# Altium PCB METR4810_PCBLayout.PcbDoc
Units mil, origin at the board's own origin, x right, y up, seen from the top; angles counter-clockwise.
Board outline 2500.12 x 1950.12 mil, 2 copper layers (Top Layer, Bottom Layer); 44 components, 43 nets, 178 pads, 18 vias.
Unrouted connection lines stored in the file: 2.
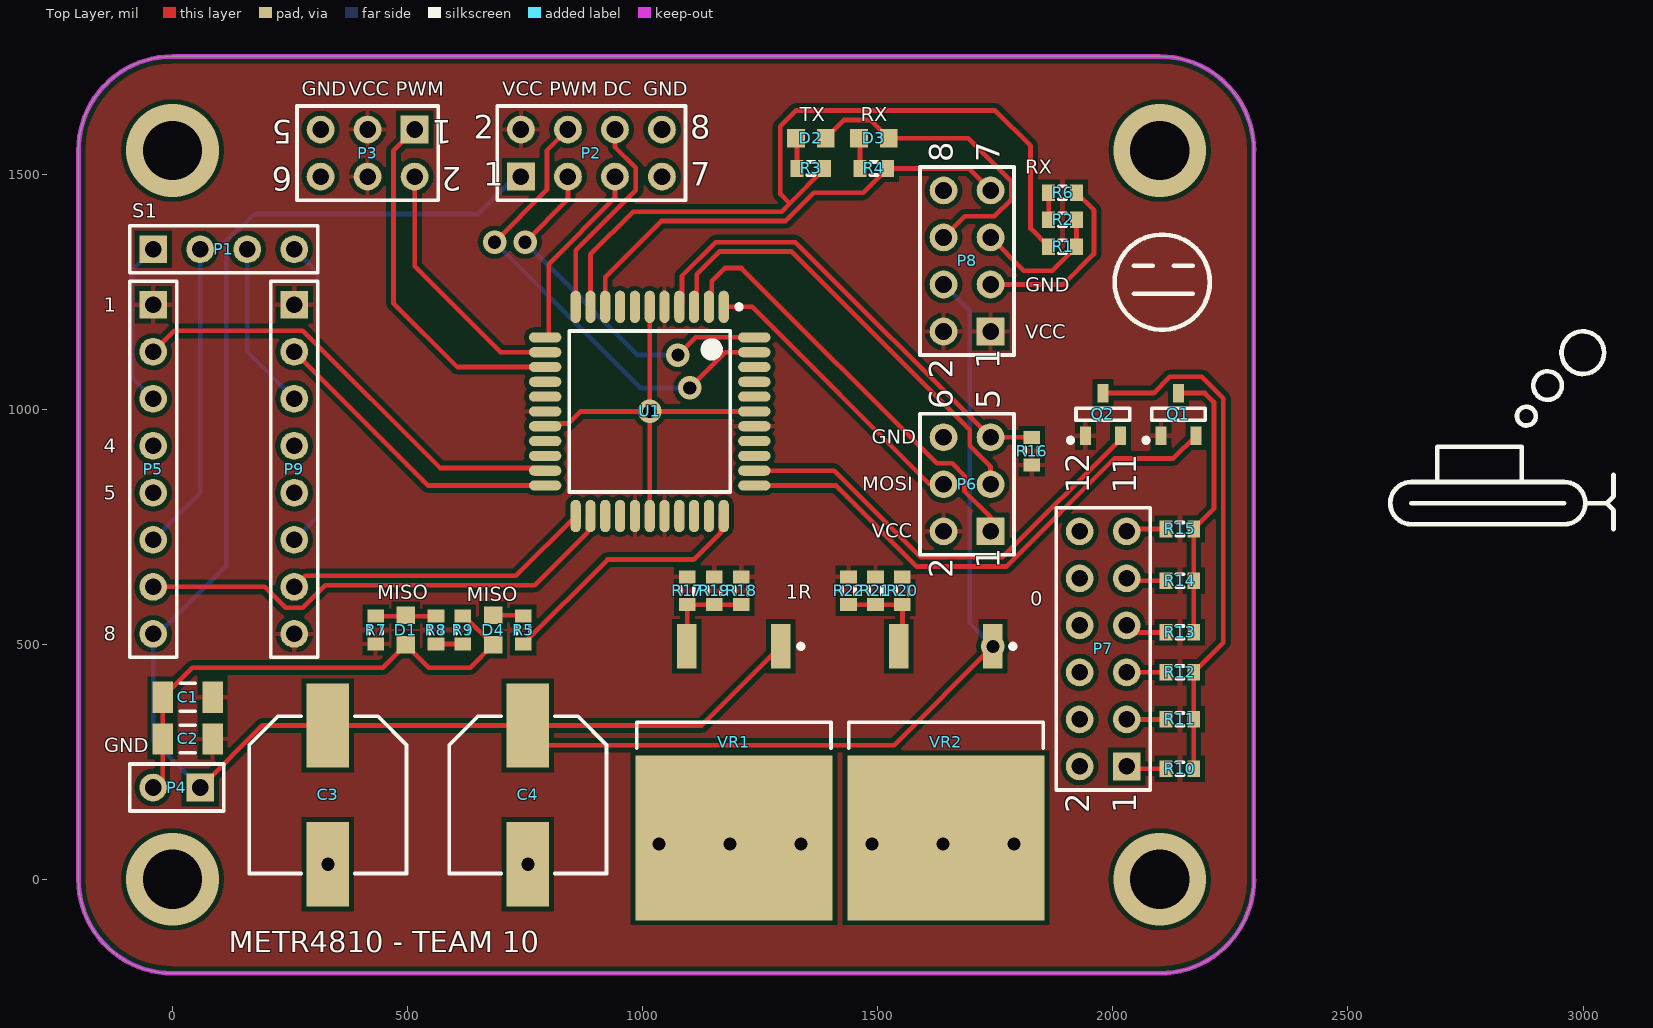
[diagram p0: Top Layer view]
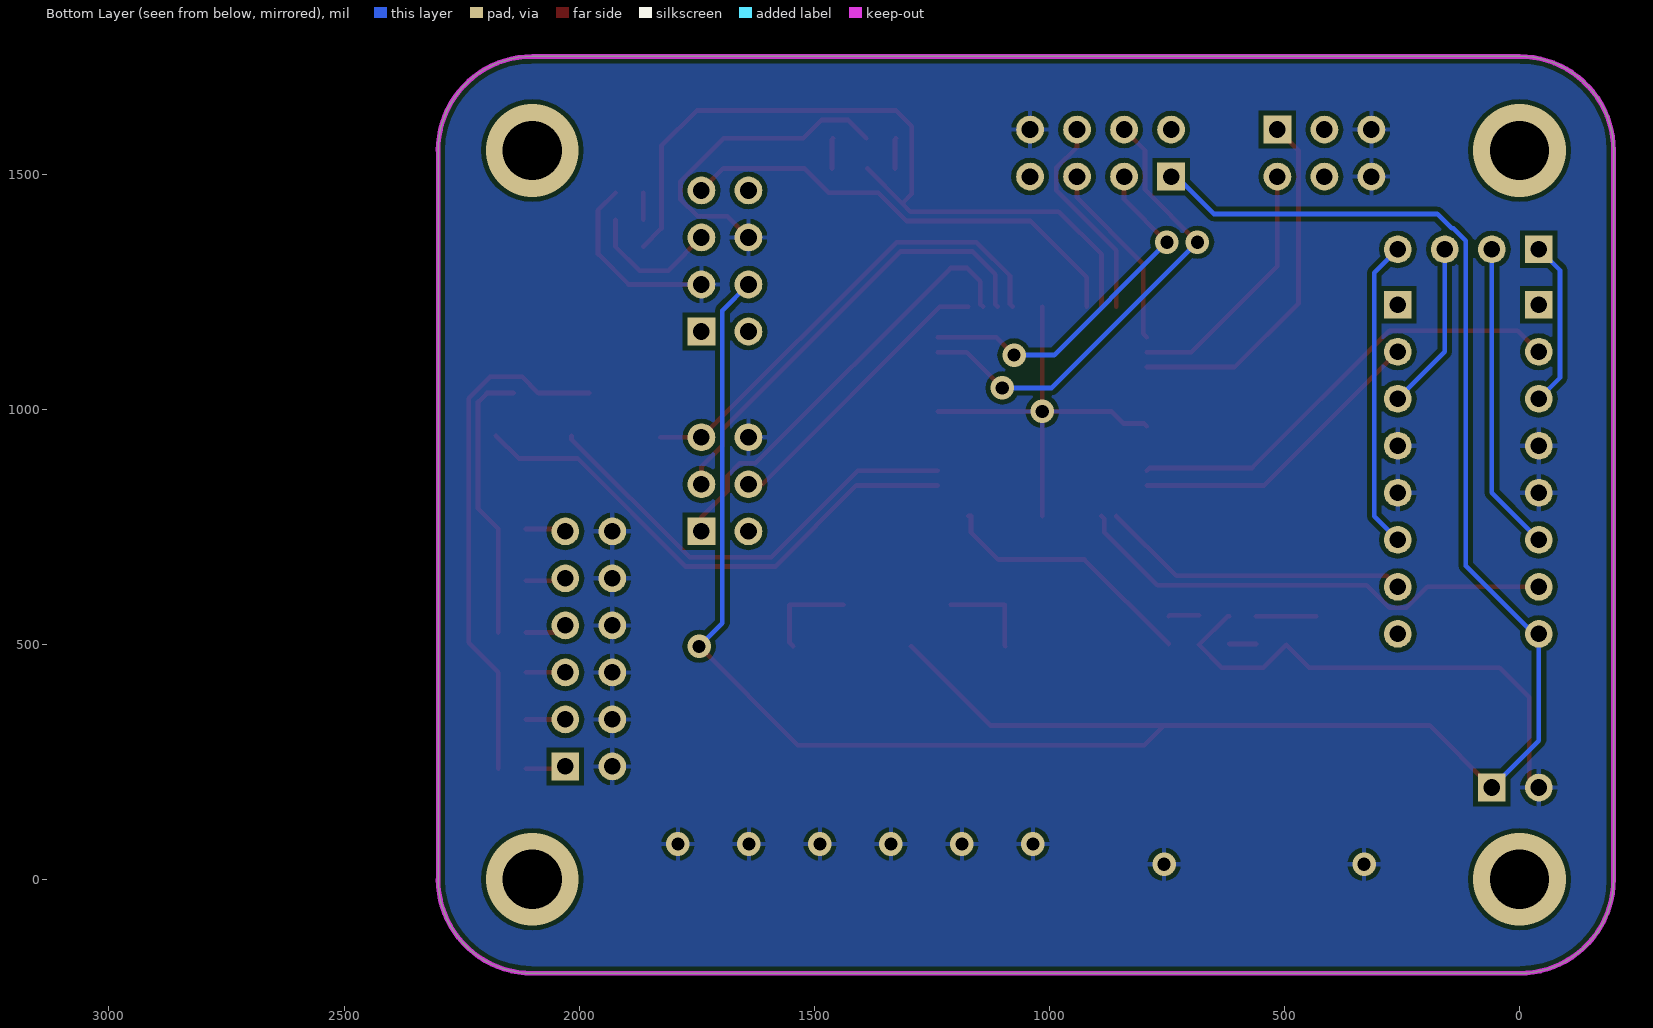
[diagram p1: Bottom Layer view, seen from below]

## Layer stack, top to bottom
Top Solder: solder mask 0.4, Solder Resist, Dk 3.5
Top Layer: signal copper 1.4
Dielectric 1: dielectric 12.6, FR-4, Dk 4.8
Bottom Layer: signal copper 1.4
Bottom Solder: solder mask 0.4, Solder Resist, Dk 3.5

## Board outline
-200,0 -200,1550 -200.06,1550 cw(c0,1550) 0,1750.06 0,1750 2100,1750 2100,1750.06 cw(c2100,1550) 2300.06,1550 2300,1550 2300,0 2300.06,0 cw(c2100,0) 2100,-200.06 2100,-200 0,-200 0,-200.06 cw(c0,0)

## Design rules (kind name [scope] priority, off if disabled: settings)
Clearance [All] p1: gap=10
PolygonConnect [All] p1: connectstyle=Relief reliefconductorwidth=10 reliefentries=4 polygonreliefangle="90 Angle" airgapwidth=10
RoomDefinition METR4810_Schematic [InComponentClass('METR4810_Schematic')] p1: confinementstyle=ConfineIn formatcopy=TRUE lockcomponents=FALSE outline -200,-200 2300,-200 2300,1750 -200,1750
RoutingVias [All] p1: holewidth=28 width=50 viastyle="Through Hole" minholewidth=28 minwidth=50 maxholewidth=28 maxwidth=50
SolderMaskExpansion [All] p1: expansion=4
Width [All] p1: maxlimit=10 minlimit=10 preferedwidth=10
30 further rules are at their usual default settings.

## Classes and differential pairs
component class METR4810_Schematic: C1 C2 C3 C4 D1 D2 D3 D4 P1 P2 P3 P4 P5 P6 P8 P9 R3 R4 R5 R7 R8 R9 R16 R17 R18 R19 R20 R21 R22 U1 VR1 VR2

## Components (designator, comment, footprint, x,y, rotation, side; value= is the part's Value field where it differs from the comment)
C1 "Cap Semi" C1206 32.13,387.07 r0 top
C2 "Cap Semi" C1206 32.13,298.32 r0 top
C3 "Cap Pol2" CAPAE9983X105M 330.52,179.46 r270 top
C4 "Cap Pol2" CAPAE9983X105M 755.89,179.46 r270 top
D1 "LED1" L0603 496.16,530.02 r270 top
D2 "LED1" L0603 1357.67,1575.91 r0 top
D3 "LED1" L0603 1491.7,1575.91 r0 top
D4 "LED1" L0603 681.7,530.02 r270 top
P1 "Header 4" HDR1X4 -41.1,1339.83 r0 top
P2 "Header 4X2" HDR2X4 741.01,1494.49 r0 top
P3 "Header 3X2" HDR2X3 515,1594.49 r180 top
P4 "Header 2" HDR1X2 58.9,195 r180 top
P5 "Header 8" HDR1X8 -41.1,1221.95 r270 top
P6 "Header 3X2" HDR2X3 1740,740 r90 top
P7 "Header 6X2" HDR2X6 2029.42,240 r90 top
P8 "Header 4X2" HDR2X4 1740,1165 r90 top
P9 "Header 8" HDR1X8 258.9,1221.95 r270 top
Q1 "MOSFET-P" SOT23-3 2139.54,988.77 r90 top
Q2 "MOSFET-P" SOT23-3 1978.94,988.77 r90 top
R1 "Res3" J1-0603 1893.16,1345.49 r0 top
R2 "Res3" J1-0603 1893.16,1402.75 r180 top
R3 "Res3" J1-0603 1357.67,1511.76 r0 top
R4 "Res3" J1-0603 1491.7,1511.76 r0 top
R5 "Res3" J1-0603 745.84,530.02 r270 top
R6 "Res3" J1-0603 1893.16,1460 r0 top
R7 "Res3" J1-0603 432.02,530.02 r90 top
R8 "Res3" J1-0603 560.3,530.02 r270 top
R9 "Res3" J1-0603 617.56,530.02 r90 top
R10 "Res3" J1-0603 2142.58,235 r0 top
R11 "Res3" J1-0603 2142.58,340 r0 top
R12 "Res3" J1-0603 2142.58,440 r0 top
R13 "Res3" J1-0603 2142.58,525 r0 top
R14 "Res3" J1-0603 2142.58,635 r0 top
R15 "Res3" J1-0603 2142.58,745 r0 top
R16 "Res3" J1-0603 1827.57,910.47 r270 top
R17 "Res3" J1-0603 1095,613.68 r90 top
R18 "Res3" J1-0603 1209.51,613.68 r90 top
R19 "Res3" J1-0603 1152.25,613.68 r90 top
R20 "Res3" J1-0603 1552.43,613.68 r90 top
R21 "Res3" J1-0603 1495.18,613.68 r90 top
R22 "Res3" J1-0603 1437.92,613.68 r90 top
U1 "ATmega324PA-AU" 44A_N 1015,995 r270 top
VR1 "Volt Reg" D2PAK_N 1194.05,227.69 r270 top
VR2 "Volt Reg" D2PAK_N 1645,227.69 r270 top

## Footprints (in the part's own frame and the unit in brackets; to place one, negate y for a bottom-side part, rotate by r counter-clockwise, add the part's x,y. Pads: shape width x height; smd on the part's side, far side on the other; paste and mask are expansions set on the pad)
44A_N [mm] "Thin QFP, 44-Leads, Body 10x10mm, Pitch 0.8mm, IPC Medium Density"
  oval 1.75x0.55 smd: 1(-5.65,4) 2(-5.65,3.2) 3(-5.65,2.4) 4(-5.65,1.6) 5(-5.65,0.8) 6(-5.65,0) 7(-5.65,-0.8) 8(-5.65,-1.6) 9(-5.65,-2.4) 10(-5.65,-3.2) 11(-5.65,-4) 23(5.65,-4) 24(5.65,-3.2) 25(5.65,-2.4) 26(5.65,-1.6) 27(5.65,-0.8) 28(5.65,0) 29(5.65,0.8) 30(5.65,1.6) 31(5.65,2.4) 32(5.65,3.2) 33(5.65,4)
  oval 0.55x1.75 smd: 12(-4,-5.65) 13(-3.2,-5.65) 14(-2.4,-5.65) 15(-1.6,-5.65) 16(-0.8,-5.65) 17(0,-5.65) 18(0.8,-5.65) 19(1.6,-5.65) 20(2.4,-5.65) 21(3.2,-5.65) 22(4,-5.65) 34(4,5.65) 35(3.2,5.65) 36(2.4,5.65) 37(1.6,5.65) 38(0.8,5.65) 39(0,5.65) 40(-0.8,5.65) 41(-1.6,5.65) 42(-2.4,5.65) 43(-3.2,5.65) 44(-4,5.65)
  silkscreen extent -5.77,-4.35 4.35,4.95, body extent -5,-5 5,5, height 1.2
C1206 [mm] "Chip Capacitor, Body 3.2x1.6mm, IPC High Density"
  rect 1.1x1.7 smd: 1(-1.35,0) 2(1.35,0)
  silkscreen extent -0.4,-0.75 0.4,0.75, body extent -1.7,-0.9 1.7,0.9, height 1.3
CAPAE9983X105M [mm] "Aluminum Electrolytic Capacitor, Body 8.30x8.30x10.50mm, IPC Low Density"
  rect 4.55x2.3 smd: 1(-3.75,0) 2(3.75,0)
  silkscreen extent -4.25,-4.25 4.25,4.25, body extent -4.25,-4.25 4.25,4.25, height 10.5
D2PAK_N [mm] "D2-PAK, 4-Leads, Body 8.8x10.4mm, Pitch 2.54mm, Lead Span 15.1mm, IPC Medium Density"
  rect 2.4x1.05 smd: 1(-6.8,2.54) 3(-6.8,-2.54)
  rect 8.9x10.65 smd: 2(3.55,0)
  silkscreen extent -6.92,-5.25 -1.3,5.25, body extent -2.7,-5.28 6.3,5.28, height 4.69
HDR1X2 [mm] "Connector; Header; 2 Position"
  rect 1.5x1.5 hole 0.9: 1(0,0)
  round 1.5 hole 0.9: 2(2.54,0)
  silkscreen extent -1.27,-1.27 3.81,1.27
HDR1X4 [mm] "Connector; Header; 4 Position"
  rect 1.5x1.5 hole 0.9: 1(0,0)
  round 1.5 hole 0.9: 2(2.54,0) 3(5.08,0) 4(7.62,0)
  silkscreen extent -1.27,-1.27 8.89,1.27
HDR1X8 [mm] "Connector; Header; 8 Position"
  rect 1.5x1.5 hole 0.9: 1(0,0)
  round 1.5 hole 0.9: 2(2.54,0) 3(5.08,0) 4(7.62,0) 5(10.16,0) 6(12.7,0) 7(15.24,0) 8(17.78,0)
  silkscreen extent -1.27,-1.27 19.05,1.27
HDR2X3 [mm] "Connector; Header; 3x2 Position"
  rect 1.5x1.5 hole 0.9: 1(0,0)
  round 1.5 hole 0.9: 2(0,2.54) 3(2.54,0) 4(2.54,2.54) 5(5.08,0) 6(5.08,2.54)
  silkscreen extent -1.27,-1.27 6.35,3.81
HDR2X4 [mm] "Connector; Header; 4x2 Position"
  rect 1.5x1.5 hole 0.9: 1(0,0)
  round 1.5 hole 0.9: 2(0,2.54) 3(2.54,0) 4(2.54,2.54) 5(5.08,0) 6(5.08,2.54) 7(7.62,0) 8(7.62,2.54)
  silkscreen extent -1.27,-1.27 8.89,3.81
HDR2X6 [mm] "Connector; Header; 6x2 Position"
  rect 1.5x1.5 hole 0.9: 1(0,0)
  round 1.5 hole 0.9: 2(0,2.54) 3(2.54,0) 4(2.54,2.54) 5(5.08,0) 6(5.08,2.54) 7(7.62,0) 8(7.62,2.54) 9(10.16,0) 10(10.16,2.54) 11(12.7,0) 12(12.7,2.54)
  silkscreen extent -1.27,-1.27 13.97,3.81
J1-0603 [mm] "Chip Resistor, Body 1.6x0.8mm, IPC High Density"
  rect 0.7x0.9 smd: 1(-0.75,0) 2(0.75,0)
  silkscreen extent -0.2,-0.35 0.2,0.35, body extent -0.85,-0.48 0.85,0.48, height 0.9
L0603 [mm]
  rect 0.95x1 smd: 1(-0.8,0) 2(0.8,0)
SOT23-3 [mm]
  rect 1x0.6 smd: 1(-1.15,0.95) 2(-1.15,-0.95) 3(1.15,0)
  silkscreen extent -1.52,-1.45 0.33,1.87

## Part data
C1 C2: "Capacitor (Semiconductor SIM Model)"
C3 C4: "Polarized Capacitor (Axial)"
D1 D2 D3 D4: "Typical RED GaAs LED"
P1: "Header, 4-Pin"
P2 P8: "Header, 4-Pin, Dual row"
P3 P6: "Header, 3-Pin, Dual row"
P4: "Header, 2-Pin"
P5 P9: "Header, 8-Pin"
P7: "Header, 6-Pin, Dual row"
Q1 Q2: "P-Channel MOSFET"
R1 R2 R3 R4 R5 R6 R7 R8 R9 R10 R11 R12 R13 R14 R15 R16 R17 R18 R19 R20 R21 R22: "Resistor"
U1: "8-bit AVR Microcontroller, 32KB Flash, 1KB EEPROM, 2KB SRAM, 44-pin TQFP, Industrial Grade (-40°C to 85°C)"
VR1 VR2: "Voltage Regulator"

## Via types
v1: diameter 50, hole 28, Top Layer to Bottom Layer, 14 vias
v2: diameter 196.85, hole 125.98, Top Layer to Bottom Layer, 4 vias

## Nets (pads, with @x,y where several pads share a name; then routed paths per layer and width w, separated by ;. In a path a pad name is that pad's centre, name@x,y a point inside that pad or via, vN(x,y) a via of type N, cw(c..) or ccw(c..) an arc to the next point about the centre after c; other vN are vias at no path point)
BAT: C3.1 C4.1 P2.1 P4.1 P5.8 P8.4 VR1.1 VR2.1 | length 5224.9
  Top Layer w10: P4.1 190.99,327.1 C3.1 C4.1 ; VR1.1 1125.74,327.1 C4.1 ; v1(1745,495.4) 1534.6,285 797.98,285 C4.1
  Bottom Layer w10: P4.1 -41.1,295 P5.8 -30.16,521.95 114.37,666.48 114.37,1358.28 140.45,1384.36 144.36,1384.36 175,1415 650,1415 729.49,1494.49 P2.1 ; P8.4 1695.47,1209.53 1695.47,544.93 v1(1745,495.4)
"DC 1 ENABLE": P2.5 U1.12 | length 403.5
  Top Layer w10: U1.12 800,1159.92 800,1308.28 941.01,1449.29 P2.5
"DC 2 ENABLE": P2.6 U1.11 | length 448.5
  Top Layer w10: U1.11 857.52,1337.52 985.54,1465.54 985.54,1512.93 941.01,1557.46 P2.6
GND: C1.1 C2.1 C3.2 C4.2 D1.2 D2.2 D3.2 D4.2 P2.8 P3.5 P3.6 P4.2 P5.4 P5.5 P6.6 P7.2 P7.4 P7.6 P7.8 P7.10 P7.12 P8.3 P8.6 P9.4 P9.5 R6.2 R9.2 U1.6 U1.18 U1.28 U1.39 VR1.2 VR2.2 | length 3055.3
  Top Layer w10: P4.2 -21.02,215.08 C2.1 C1.1 41.91,450 447.64,450 D1.2 544.68,450 633.18,450 D4.2 620.68,559.55 R9.2 ; U1.18 798.23,969.17 842.01,969.17 867.83,995 v1(1015,995) ; U1.28 v1(1015,995) ; U1.6 v1(1015,995) ; U1.39 v1(1015,995) ; D2.2 1428.26,1615 1484.1,1615 D3.2 1692.07,1575.91 1784.53,1483.44 1784.53,1446.56 1747.97,1410 1685,1410 P8.6 ; P8.3 1894.9,1265 1959.9,1330 1960,1330 1960,1422.69 R6.2
  other v1: 330.52,31.82 755.89,31.82 1035,75 1186,75 1337,75 1488,75 1639,75 1790,75
HI-BEAM: Q1.2 U1.34 | length 1126.3
  Top Layer w10: U1.34 1410.83,837.52 1583.35,665 1773.55,665 2003.55,895 2128.44,895 Q1.2
LO-BEAM: Q2.2 U1.35 | length 966.5
  Top Layer w10: U1.35 1407.62,869.02 1591.63,685 1765.27,685 2016.34,936.07 Q2.2
MISO: P6.1 U1.2 | length 930.5
  Top Layer w10: U1.2 1146.65,1223.11 1146.65,1271.65 1175,1300 1210,1300 1625.47,884.53 1658.44,884.53 1684.53,858.44 1684.53,825.47 1740,770 P6.1
MOSI: P6.4 U1.1 | length 623.9
  Top Layer w10: U1.1 1232.63,1217.44 1610.07,840 P6.4
NetD2_1: D2.1 R3.1 | length 65
  Top Layer w10: D2.1 1328.15,1573.94 R3.1
NetD3_1: D3.1 R4.1 | length 65
  Top Layer w10: D3.1 1462.17,1573.94 R4.1
NetD4_1: D4.1 R5.1 | length 65
  Top Layer w10: D4.1 743.88,561.52 R5.1
NetQ1_3: Q1.3 R13.2 R14.2 R15.2 | length 591.1
  Top Layer w10: Q1.3 2195.95,1034.05 2215,1015 2215,787.89 R15.2 R14.2 R13.2
NetQ2_3: Q2.3 R10.2 R11.2 R12.2 | length 1103.6
  Top Layer w10: Q2.3 2086.83,1034.05 2121.51,1068.73 2189.55,1068.73 2235,1023.28 2235,502.89 R12.2 R11.2 R10.2
NetR2_2: R2.2 R6.1 | length 57.3
  Top Layer w10: R2.2 R6.1
NetR8_2: R8.2 R9.1 | length 57.3
  Top Layer w10: R8.2 R9.1
NetR17_1: R17.1 R18.1 R19.1 VR1.3 | length 203.7
  Top Layer w10: VR1.3 1095,496.36 R17.1 R19.1 R18.1
NetR20_1: R20.1 R21.1 R22.1 VR2.3 | length 206.3
  Top Layer w10: R22.1 R21.1 R20.1 1552.43,502.83 VR2.3
POWER: D1.1 R7.2 R8.1 | length 128.3
  Top Layer w10: R7.2 494.19,559.55 R8.1
"PWM DC 1": P2.3 U1.44 | length 779.6
  Top Layer w10: v1(750,1355) 841.01,1446.01 P2.3 ; v1(1075,1115) 1112.48,1152.48 U1.44
  Bottom Layer w10: v1(750,1355) 990,1115 v1(1075,1115)
"PWM DC 2": P2.4 U1.43 | length 1016.4
  Top Layer w10: v1(685,1355) 796.48,1466.48 796.48,1549.96 P2.4 ; v1(1100,1045) 1175.98,1120.98 U1.43
  Bottom Layer w10: v1(685,1355) 995,1045 v1(1100,1045)
"PWM SV 1": P3.2 U1.13 | length 544
  Top Layer w10: P3.2 515,1303.69 697.7,1120.98 U1.13
"PWM SV 2": P3.1 U1.14 | length 766.8
  Top Layer w10: P3.1 470,1549.49 470,1225 605.51,1089.49 U1.14
RESET: P6.5 R16.1 U1.4 | length 1013.9
  Top Layer w10: U1.4 1083.66,1223.11 1083.66,1283.66 1155,1355 1325,1355 P6.5 R16.1
RXD: P8.7 R4.2 U1.9 | length 997.7
  Top Layer w10: U1.9 920.51,1280.51 1040,1400 1303.72,1400 1363.72,1460 1469.46,1460 R4.2 1693.24,1511.76 P8.7
S-IN1: P5.2 U1.21 | length 975.3
  Top Layer w10: P5.2 3.43,1166.48 277.34,1166.48 569.13,874.69 786.89,874.69 U1.21
S-IN2: P5.7 U1.24 | length 1046.2
  Top Layer w10: P5.7 195.93,621.95 240.45,577.42 277.34,577.42 325.29,625.37 770.48,625.37 883.35,738.24 883.35,766.89 U1.24
S-IN3: P9.2 U1.22 | length 651.5
  Top Layer w10: P9.2 543.33,837.52 U1.22
S-IN4: P9.7 U1.23 | length 661
  Top Layer w10: P9.7 282.32,645.37 730.33,645.37 U1.23
S-OUT1: P1.1 P5.3 | length 355.2
  Bottom Layer w10: P5.3 -86.1,1066.95 -86.1,1294.83 P1.1
S-OUT2: P1.2 P5.6 | length 659.3
  Bottom Layer w10: P5.6 58.9,821.95 P1.2
S-OUT3: P1.3 P9.3 | length 359.3
  Bottom Layer w10: P1.3 158.9,1121.95 P9.3
S-OUT4: P1.4 P9.6 | length 659.3
  Bottom Layer w10: P9.6 308.9,771.95 308.9,1289.83 P1.4
SCK: P6.3 U1.3 | length 963.6
  Top Layer w10: U1.3 1115.16,1223.11 1115.16,1286.87 1163.28,1335 1316.72,1335 1695.47,956.24 1695.47,921.56 1740,877.03 P6.3
STATUS: R5.2 U1.33 | length 559.4
  Top Layer w10: R5.2 925.35,680 1108.57,680 1166.81,738.24 1166.81,772.56 U1.33
TORCH1: P7.1 R10.1 | length 85.7
  Top Layer w10: P7.1 2034.42,235 R10.1
TORCH2: P7.3 R11.1 | length 83.6
  Top Layer w10: P7.3 R11.1
TORCH3: P7.5 R12.1 | length 83.6
  Top Layer w10: P7.5 R12.1
TORCH4: P7.7 R13.1 | length 89.8
  Top Layer w10: P7.7 2044.42,525 R13.1
TORCH5: P7.9 R14.1 | length 85.7
  Top Layer w10: P7.9 2034.42,635 R14.1
TORCH6: P7.11 R15.1 | length 85.7
  Top Layer w10: P7.11 2034.42,745 R15.1
TXD: R1.1 R3.2 U1.10 | length 1666.2
  Top Layer w10: U1.10 889.02,1329.02 980,1420 1295.44,1420 1312.72,1437.28 ; R3.2 1312.72,1437.28 ; R1.1 1825,1384.12 1825,1560 1750,1635 1325.67,1635 1292.48,1601.8 1292.48,1457.52 1312.72,1437.28
TXD_3.3V: P8.5 R1.2 R2.1 | length 290.4
  Top Layer w10: P8.5 1810.67,1294.33 1871.53,1294.33 R1.2 R2.1
VCC: C1.2 C2.2 P2.2 P3.3 P3.4 P5.1 P6.2 P8.1 P8.2 P9.1 P9.8 Q1.1 Q2.1 R7.1 R16.2 R17.2 R18.2 R19.2 R20.2 R21.2 R22.2 U1.5 U1.17 U1.27 U1.29 U1.38
pads on no net: P2.7 P8.8 U1.7 U1.8 U1.15 U1.16 U1.19 U1.20 U1.25 U1.26 U1.30 U1.31 U1.32 U1.36 U1.37 U1.40 U1.41 U1.42
copper on no net:
  other v2: 0,0 2100,0 0,1550 2100,1550

## Polygon pours and split planes (outlines as drawn)
GND on Bottom Layer "GND_L02_P002" (solid, remove dead copper, pour order 2): -200,0 -200,1550 -200.06,1550 cw(c0,1550) 0,1750.06 0,1750 2100,1750 2100,1750.06 cw(c2100,1550) 2300.06,1550 2300,1550 2300,0 2300.06,0 cw(c2100,0) 2100,-200.06 2100,-200 0,-200 0,-200.06 cw(c0.03,-0.03)
VCC on Top Layer "VCC_L01_P003" (solid, remove dead copper, pour order 3): -200,0 -200,1550 -200.06,1550 cw(c0,1550) 0,1750.06 0,1750 2100,1750 2100,1750.06 cw(c2100,1550) 2300.06,1550 2300,1550 2300,0 2300.06,0 cw(c2100,0) 2100,-200.06 2100,-200 0,-200 0,-200.06 cw(c0.03,-0.03)

## Keep-outs
Keep-Out Layer:
  lines w10: -200.06,0 ccw(c0,0) 0,-200.06 ; -200.06,1550 cw(c0,1550) 0,1750.06 ; -200,0 -200,1550 ; 0,-200 2100,-200 ; 0,1750 2100,1750 ; 2100,-200.06 ccw(c2100,0) 2300.06,0 ; 2100,1750.06 cw(c2100,1550) 2300.06,1550 ; 2300,0 2300,1550

## Silkscreen, mask and mechanical layers (free items; w line width, h text height)
Top Overlay:
  circle w10: c2105,1270 r101.24
  circle w10: c2999.59,1120 r45.28
  circle w10: c2924.59,1050 r30.41
  circle w10: c2879.59,985 r20
  lines w10: 2045,1245 2170,1245 ; 2045,1305 2085,1305 ; 2130,1305 2170,1305 ; 2635,800 2960,800 ; 2690,845 2690,920 2870,920 2870,845 ; 3005,800 3050,800 ; 3065,745 3065,785 3050,800 ; 3065,860 3065,815 3050,800 ; 2635,755 cw(c2635,800) 2635,845 2960,845 cw(c2960,800) 2960,755 2635,755
  text "GND" at 275.01,1665.97 h30
  text "VCC" at 375.01,1665.97 h30
  text "PWM" at 475.01,1665.97 h30
  text "VCC" at 701.02,1665.97 h30
  text "PWM" at 801.02,1665.97 h30
  text "DC" at 916.02,1665.97 h30
  text "GND" at 1001.02,1665.97 h30
  text "TX" at 1333.9,1611.95 h30
  text "RX" at 1463.9,1611.95 h30
  text "RX" at 1813.9,1500.97 h30
  text "S1" at -86.1,1406.95 h30
  text "GND" at 1813.9,1250 h30
  text "1" at -146.1,1206.95 h30
  text "VCC" at 1813.9,1150 h30
  text "GND" at 1487.01,925.97 h30
  text "4" at -146.1,906.95 h30
  text "MOSI" at 1467.02,825.97 h30
  text "5" at -146.1,806.95 h30
  text "VCC" at 1487.01,725.97 h30
  text "1R" at 1303.9,596.95 h30
  text "MISO" at 435.51,595.97 h30
  text "MISO" at 625.51,590.97 h30
  text "0" at 1823.9,581.95 h30
  text "8" at -146.1,506.95 h30
  text "GND" at -145,270 h30
  text "METR4810 - TEAM 10" at 120,-155 h45

## Text inside footprints (layer, text, board x,y; h text height)
P2: Top Overlay "8" at 1101.01,1574.49 h50; Top Overlay "7" at 1101.01,1474.49 h50; Top Overlay "1" at 661.01,1474.49 h50; Top Overlay "2" at 641.01,1574.49 h50
P3: Top Overlay "1" at 595,1614.49 h50 r180; Top Overlay "2" at 615,1514.49 h50 r180; Top Overlay "5" at 255,1614.49 h50 r180; Top Overlay "6" at 255,1514.49 h50 r180
P6: Top Overlay "1" at 1760,660 h50 r90; Top Overlay "2" at 1660,640 h50 r90; Top Overlay "5" at 1760,1000 h50 r90; Top Overlay "6" at 1660,1000 h50 r90
P7: Top Overlay "2" at 1949.42,140 h50 r90; Top Overlay "1" at 2049.42,140 h50 r90; Top Overlay "1" at 2049.42,820 h50 r90; Top Overlay "1" at 2049.42,860 h50 r90; Top Overlay "12" at 1949.42,820 h50 r90
P8: Top Overlay "8" at 1660,1525 h50 r90; Top Overlay "7" at 1760,1525 h50 r90; Top Overlay "1" at 1760,1085 h50 r90; Top Overlay "2" at 1660,1065 h50 r90